# Altium PCB MT6825.PcbDoc
Units mil, origin at the board's own origin, x right, y up, seen from the top; angles counter-clockwise.
Board outline 1600 x 1600 mil, 2 copper layers (Top Layer, Bottom Layer); 7 components, 6 nets, 30 pads, 8 vias.
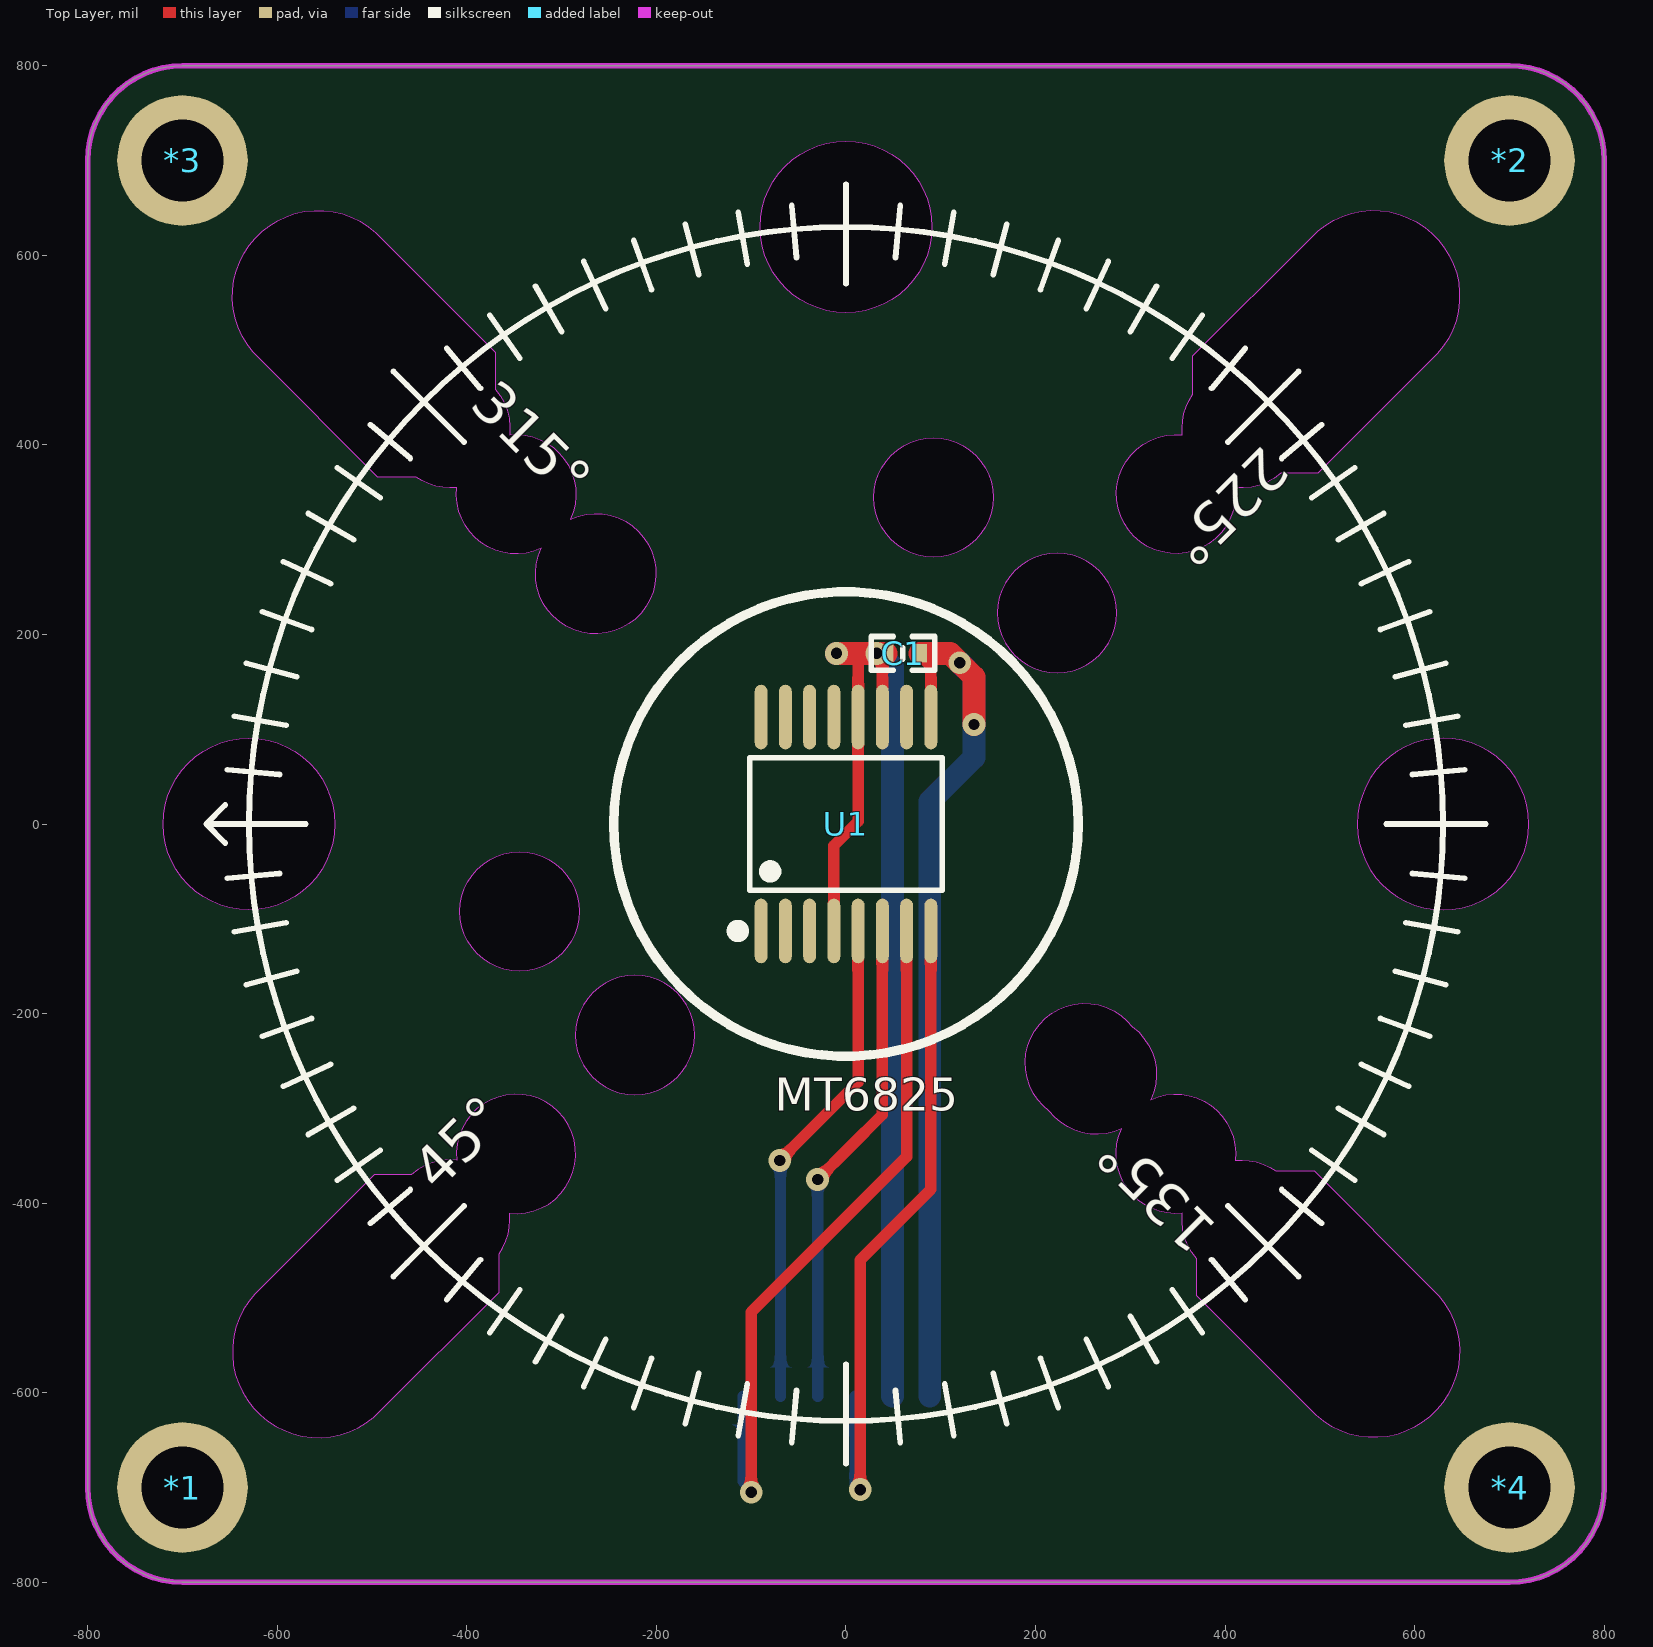
[diagram p0: Top Layer view]
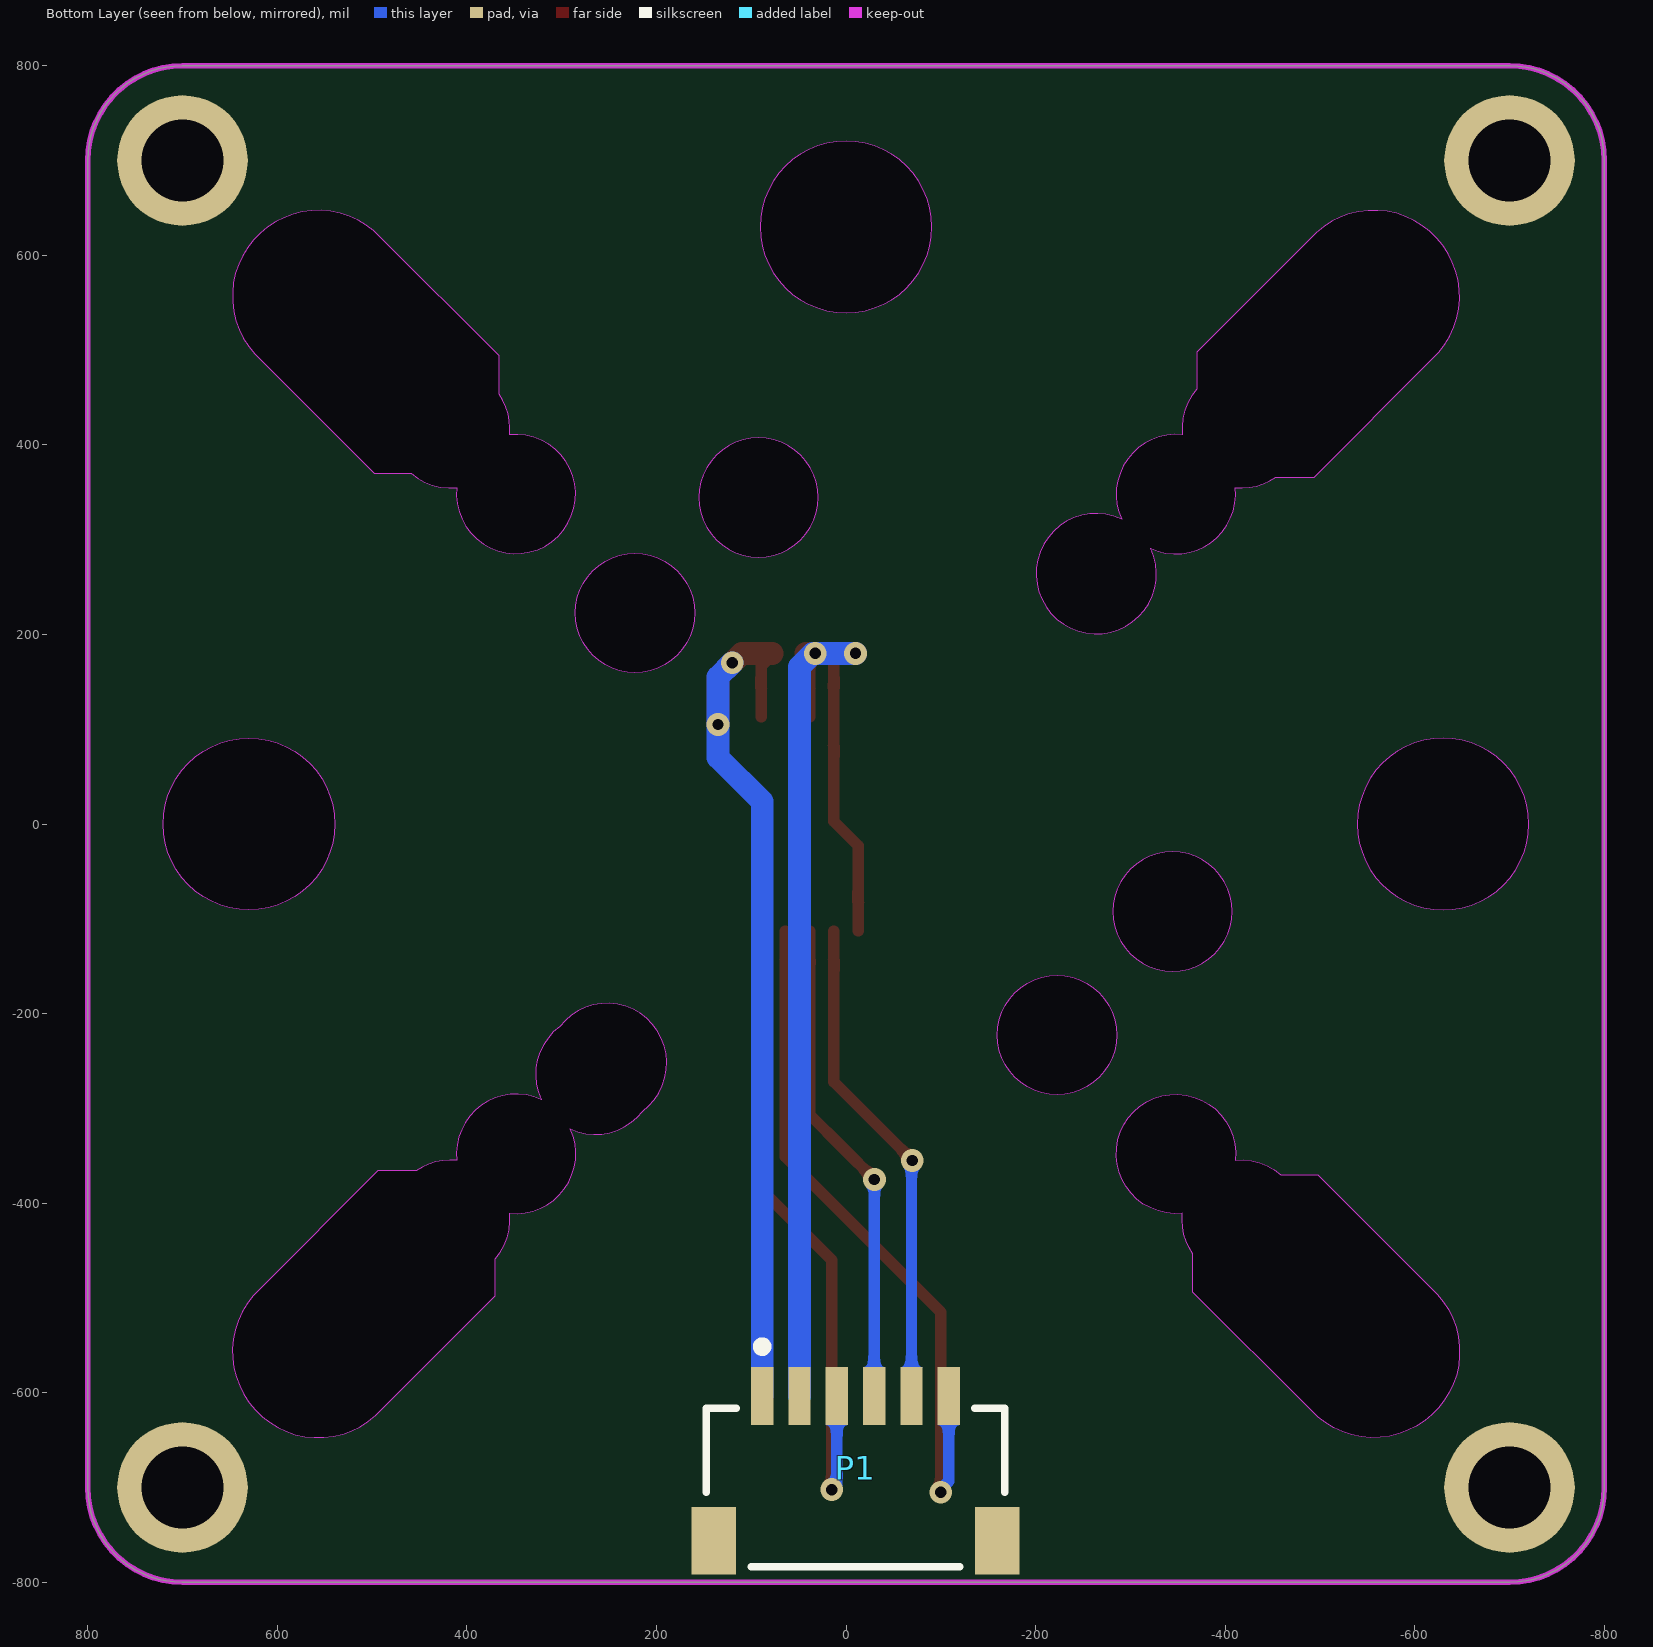
[diagram p1: Bottom Layer view, seen from below]

## Layer stack, top to bottom
Top Solder: solder mask 0.4, Solder Resist, Dk 3.5
Top Layer: signal copper 1.4
Dielectric 1: dielectric 12.6, FR-4, Dk 4.8
Bottom Layer: signal copper 1.4
Bottom Solder: solder mask 0.4, Solder Resist, Dk 3.5

## Board outline
-700,-800 cw(c-699.99,-699.99) -800,-700 -800,700 cw(c-699.99,699.99) -700,800 700,800 cw(c699.99,699.99) 800,700 800,-700 cw(c699.99,-699.99) 700,-800
cut-out: 267.26,267.26 ccw(c222.72,222.72) 178.18,267.26 ccw(c222.72,222.72) 178.18,178.18 ccw(c222.72,222.72) 267.26,178.18 ccw(c222.72,222.72)
cut-out: -178.16,-178.16 ccw(c-222.7,-222.7) -267.25,-178.16 ccw(c-222.7,-222.7) -267.25,-267.25 ccw(c-222.7,-222.7) -178.16,-267.25 ccw(c-222.7,-222.7)
cut-out: -629.92,-90.55 cw(c-629.92,0) -720.47,0 cw(c-629.92,0) -629.92,90.55 cw(c-629.92,0) -539.37,0 cw(c-629.92,0)
cut-out: 539.37,0 ccw(c629.92,0) 629.92,-90.55 ccw(c629.92,0) 720.47,0 ccw(c629.92,0) 629.92,90.55 ccw(c629.92,0)
cut-out: 0,539.37 cw(c0,629.92) -90.55,629.92 cw(c0,629.92) 0,720.47 cw(c0,629.92) 90.55,629.92 cw(c0,629.92)
cut-out: -344.53,-155.3 cw(c-344.53,-92.31) -407.52,-92.31 cw(c-344.53,-92.31) -344.53,-29.32 cw(c-344.53,-92.31) -281.54,-92.31 cw(c-344.53,-92.31)
cut-out: 92.33,281.55 cw(c92.33,344.55) 29.33,344.55 cw(c92.33,344.55) 92.33,407.54 cw(c92.33,344.55) 155.32,344.55 cw(c92.33,344.55)
cut-out: -493.82,365.83 -618.7,490.71 cw(c-556.77,556.77) -495.99,623.89 -370,497.9 -370,458.91 cw(c-417.55,417.63) -354.97,410.64 cw(c-348.13,347.91) -290.71,321.74 cw(c-264.09,264.1) -321.73,290.72 cw(c-347.98,347.98) -410.59,354.87 cw(c-417.45,417.53) -453.52,365.83
cut-out: -623.89,-495.99 ccw(c-556.77,-556.77) -490.71,-618.7 -365.83,-493.82 -365.83,-453.52 ccw(c-417.57,-417.58) -354.96,-410.6 ccw(c-348.02,-348.04) -410.61,-354.69 ccw(c-417.23,-417.48) -458.91,-370.06 -497.9,-370
cut-out: 354.97,-410.64 cw(c348.13,-347.91) 290.71,-321.74 cw(c264.39,-264.76) 214.67,-303.06 cw(c252.13,-252.27) 302.15,-213.8 cw(c264.3,-264.38) 321.73,-290.72 cw(c347.98,-347.98) 410.59,-354.87 cw(c417.45,-417.53) 453.52,-365.83 493.82,-365.83 618.7,-490.71 cw(c556.77,-556.77) 495.99,-623.89 370,-497.9 370,-458.91 cw(c417.56,-417.63)
cut-out: 354.87,410.59 cw(c417.53,417.45) 365.83,453.52 365.83,493.82 490.71,618.7 cw(c556.77,556.77) 623.89,495.99 497.9,370 458.91,370 cw(c417.63,417.56) 410.64,354.97 cw(c348.17,348.1)

## Design rules (kind name [scope] priority, off if disabled: settings)
Clearance [All] p1: gap=6 ignorepadtopadclearanceinfootprint=TRUE except(0: Arc-Hole Track-Hole SMDPad-Hole THPad-Hole Via-Hole Fill-Hole Poly-Hole Region-Hole Text-Hole)
PolygonConnect [All] p1: connectstyle=Relief reliefconductorwidth=10 reliefentries=4 polygonreliefangle="90 Angle" airgapwidth=10
RoutingVias [All] p1: holewidth=12 width=24 viastyle="Through Hole" minholewidth=12 minwidth=24 maxholewidth=24 maxwidth=48
SolderMaskExpansion [All] p1: expansion=4 istentingtop=FALSE
Width [All] p1: maxlimit=100 minlimit=10 preferedwidth=10
30 further rules are at their usual default settings.

## Components (designator, comment, footprint, x,y, rotation, side; value= is the part's Value field where it differs from the comment)
*1 "PAD2.0" PAD2.0 -699.99,-699.99 r0 top
*2 "PAD2.0" PAD2.0 699.99,699.99 r0 top
*3 "PAD2.0" PAD2.0 -699.99,699.99 r0 top
*4 "PAD2.0" PAD2.0 699.99,-699.99 r0 top
C1 "0.1uF" "C 0402_L" 60.01,180.01 r180 top
P1 "ENC_SPI" JST-SM06B-SRSS-TB_V -10,-700 r180 bottom
U1 "MT6825GT-M4D" TSSOP-16_L5.0-W4.4-P0.65-LS6.4-BL 0,-0.01 r0 top locked

## Footprints (in the part's own frame and the unit in brackets; to place one, negate y for a bottom-side part, rotate by r counter-clockwise, add the part's x,y. Pads: shape width x height; smd on the part's side, far side on the other; paste and mask are expansions set on the pad)
"C 0402_L" [mm] "无极性贴片电容         淘宝ID:黄晶宝石"
  rect 0.4x0.5 smd: 1(-0.45,0) 2(0.45,0)
  silkscreen extent -0.85,-0.45 0.85,0.45, body extent -0.5,-0.26 0.5,0.26, height 0.53
JST-SM06B-SRSS-TB_V [mm] "SMD, 6-Leads, Body 8x4.25mm, Pitch 1mm"
  rect 0.6x1.55 smd: 1(-2.5,2.45) 2(-1.5,2.45) 3(-0.5,2.45) 4(0.5,2.45) 5(1.5,2.45) 6(2.5,2.45)
  rect 1.2x1.8 smd: MP1(-3.8,-1.425) MP2(3.8,-1.425)
  silkscreen extent -4,-2.12 4,3.9, body extent -4,-2.12 4,2.83, height 2.9
PAD2.0 [mm]
  round 3.5 hole 2.2: 0(0,0)
TSSOP-16_L5.0-W4.4-P0.65-LS6.4-BL [mm]
  oval 0.343x1.731 smd: 1(-2.275,-2.866) 2(-1.625,-2.866) 3(-0.975,-2.866) 4(-0.325,-2.866) 5(0.325,-2.866) 6(0.975,-2.866) 7(1.625,-2.866) 8(2.275,-2.866) 9(2.275,2.866) 10(1.625,2.866) 11(0.975,2.866) 12(0.325,2.866) 13(-0.325,2.866) 14(-0.975,2.866) 15(-1.625,2.866) 16(-2.275,2.866)
  silkscreen extent -3.05,-3.02 2.58,1.77, body extent -2.51,-3.21 2.49,3.19, height 1.1

## Part data
C1: library part C, "贴片电容"
P1: library part SM06B-SRSS-TB(LF)(SN), "Male Header, Pitch 1 mm, 1 x 6 Position, Height 2.9 mm, -25 to 85 degC, RoHS, Tape and Reel", Manufacturer=JST, Package Description="Male Header, Pitch 1 mm, 1 X 6 Position, Height 2.9 mm", Datasheet URL=http://www.jst-mfg.com/product/pdf/eng/eSR.pdf, Datasheet Version=05/2016, Manufacturer URL=http://www.jst.com/home2.html, Mounting Technology=SurfaceMount, No of Positions=6, Package Reference=SM06B-SRSS-TB(LF)(SN), Pitch=1mm, Style/Orientation=RightAngleHeader/Plug, Termination=Solder, Type=ShroudedHeader
U1: BOM_JLCPCB Part Class="Extended Part", BOM_Manufacturer="Magn Tek", BOM_Manufacturer Part=MT6825GT-M4D, BOM_Supplier=LCSC, BOM_Supplier Part=C879563, Contributor=LCSC, spicePre=U, spiceSymbolName=MT6825GT-M4D

## Via types
v1: diameter 24, hole 12, Top Layer to Bottom Layer, tented both sides, 8 vias

## Nets (pads, with @x,y where several pads share a name; then routed paths per layer and width w, separated by ;. In a path a pad name is that pad's centre, name@x,y a point inside that pad or via, vN(x,y) a via of type N, cw(c..) or ccw(c..) an arc to the next point about the centre after c; other vN are vias at no path point)
ENC_MISO: P1.5 U1.5 | length 525.4
  Top Layer w12: v1(-70,-355) 12.8,-272.2 U1.5
  Bottom Layer w12: v1(-70,-355) -69.06,-355.94 P1.5
ENC_MOSI: P1.4 U1.6 | length 519.2
  Top Layer w12: v1(-30,-375) 2.84,-342.16 38.39,-306.61 U1.6
  Bottom Layer w12: v1(-30,-375) -30,-491.88 -29.68,-492.19 P1.4
ENC_nCS: P1.3 U1.8 | length 721.1
  Top Layer w12: v1(15.01,-702.17) 15.01,-459.99 89.57,-385.43 U1.8
  Bottom Layer w12: P1.3 9.68,-693.6 15.01,-698.93 v1(15.01,-702.17)
ENC_SCLK: P1.6 U1.7 | length 765
  Top Layer w12: v1(-100,-705) -100,-515 63.98,-351.02 U1.7
  Bottom Layer w12: P1.6 -108.43,-693.33 -100,-701.75 v1(-100,-705)
GND: C1.2 P1.2 U1.4 U1.11 U1.12 | length 1262.8
  Top Layer w12: U1.4 -12.79,-22.79 12.8,2.8 U1.12 12.8,178.47 11.26,180.01 ; v1(32.51,180.01) 32.51,176.76 38.39,170.88 U1.11
  Top Layer w24: v1(-9.99,180.01) 11.26,180.01 v1(32.51,180.01) C1.2
  Bottom Layer w24: v1(-9.99,180.01) v1@35.01,180.01 ; v1(32.51,180.01) v1@35,180.01 ; P1.2 49.06,165.95 v1@35,180.01
VCC3V3: C1.1 P1.1 U1.9 | length 988.8
  Top Layer w12: C1.1 77.72,178.04 89.57,166.2 U1.9
  Top Layer w24: C1.1 110.01,180.01 135.01,155.01 v1(135.01,105.01)
  Bottom Layer w24: P1.1 88.43,23.7 135.01,70.28 v1(135.01,105.01) 135.01,155.01 v1(120.01,170.01)
pads on no net: *1.0 *2.0 *3.0 *4.0 P1.MP1 P1.MP2 U1.1 U1.2 U1.3 U1.10 U1.13 U1.14 U1.15 U1.16

## Keep-outs
Keep-Out Layer:
  the board outline again, w5.98

## Silkscreen, mask and mechanical layers (free items; w line width, h text height)
Top Overlay:
  circle w6: c0,0 r629.92
  circle w10: c0,0 r245
  lines w6: -655,-20 -675,0 ; -655,20 -675,0 ; -652.56,-57.09 -597.72,-52.29 ; -652.56,57.09 -597.72,52.29 ; -645.1,-113.75 -590.88,-104.19 ; -645.1,113.75 -590.89,104.19 ; -632.73,-169.54 -579.56,-155.29 ; -632.73,169.54 -579.56,155.29 ; -615.55,-224.04 -563.82,-205.21 ; -615.55,224.04 -563.82,205.21 ; -593.68,-276.84 -543.78,-253.57 ; -593.68,276.84 -543.79,253.57 ; -570,0 -675,0 ; -567.29,-327.53 -519.62,-300 ; -567.29,327.53 -519.62,300 ; -536.59,-375.72 -491.49,-344.15 ; -536.59,375.72 -491.49,344.15 ; -501.8,-421.06 -459.63,-385.67 ; -501.8,421.06 -459.63,385.67 ; -477.3,-477.3 -403.05,-403.05 ; -477.3,477.3 -403.05,403.05 ; -463.19,-463.19 -424.26,-424.26 ; -463.19,463.19 -424.26,424.26 ; -421.06,-501.8 -385.67,-459.63 ; -421.06,501.8 -385.67,459.63 ; -375.72,-536.59 -344.15,-491.49 ; -375.72,536.59 -344.15,491.49 ; -327.53,-567.29 -300,-519.62 ; -327.53,567.29 -300,519.62 ; -276.84,-593.68 -253.57,-543.78 ; -276.84,593.68 -253.57,543.79 ; -224.04,-615.55 -205.21,-563.82 ; -224.04,615.55 -205.21,563.82 ; -169.54,-632.73 -155.29,-579.56 ; -169.54,632.73 -155.29,579.56 ; -113.75,-645.1 -104.19,-590.88 ; -113.75,645.1 -104.19,590.89 ; -57.09,-652.56 -52.29,-597.72 ; -57.09,652.56 -52.29,597.72 ; 0,-675 0,-570 ; 0,-655.05 0,-600 ; 0,570 0,675 ; 0,600 0,655.05 ; 52.29,-597.72 57.09,-652.56 ; 52.29,597.72 57.09,652.56 ; 104.19,-590.88 113.75,-645.1 ; 104.19,590.89 113.75,645.1 ; 155.29,-579.56 169.54,-632.73 ; 155.29,579.56 169.54,632.73 ; 205.21,-563.82 224.04,-615.55 ; 205.21,563.82 224.04,615.55 ; 253.57,-543.78 276.84,-593.68 ; 253.57,543.79 276.84,593.68 ; 300,-519.62 327.53,-567.29 ; 300,519.62 327.53,567.29 ; 344.15,-491.49 375.72,-536.59 ; 344.15,491.49 375.72,536.59 ; 385.67,-459.63 421.06,-501.8 ; 385.67,459.63 421.06,501.8 ; 403.05,-403.05 477.3,-477.3 ; 403.05,403.05 477.3,477.3 ; 424.26,-424.26 463.19,-463.19 ; 424.26,424.26 463.19,463.19 ; 459.63,-385.67 501.8,-421.06 ; 459.63,385.67 501.8,421.06 ; 491.49,-344.15 536.59,-375.72 ; 491.49,344.15 536.59,375.72 ; 519.62,-300 567.29,-327.53 ; 519.62,300 567.29,327.53 ; 543.79,-253.57 593.68,-276.84 ; 543.78,253.57 593.68,276.84 ; 563.82,-205.21 615.55,-224.04 ; 563.82,205.21 615.55,224.04 ; 570,0 675,0 ; 579.56,-155.29 632.73,-169.54 ; 579.56,155.29 632.73,169.54 ; 590.89,-104.19 645.1,-113.75 ; 590.88,104.19 645.1,113.75 ; 597.72,-52.29 652.56,-57.09 ; 597.72,52.29 652.56,57.09 ; 600,0 655.05,0
  text "315°" at -408.31,430.66 h75 r315
  text "225°" at 429.6,411.15 h75 r225
  text "MT6825" at -75,-314.36 h60
  text "45°" at -420.56,-399.44 h75 r45
  text "135°" at 404.4,-415.53 h75 r135
Mechanical 1:
  circle w5.98: c222.72,222.72 r62.99
  circle w5.98: c-222.7,-222.7 r62.99
  circle w5.98: c92.33,344.55 r62.99
  circle w5.98: c-344.53,-92.31 r62.99
  circle w5.98: c0,629.92 r90.55
  circle w5.98: c-629.92,0 r90.55
  circle w5.98: c629.92,0 r90.55
  lines w5.98: -458.91,-370.06 cw(c-417.57,-417.58) -410.64,-354.97 ; -458.91,-370 -497.9,-370 -623.89,-495.99 ccw(c-556.77,-556.77) -490.71,-618.7 -365.83,-493.82 -365.83,-468.17 -365.83,-453.52 ccw(c-417.57,-417.58) -354.96,-410.6 ; -410.61,-354.69 cw(c-347.98,-347.98) -354.87,-410.59 ; -410.59,354.87 ccw(c-347.98,347.98) -321.73,290.72 ccw(c-264.46,264.48) -291.05,321.58 ; -410.6,354.96 cw(c-417.58,417.57) -453.52,365.83 -468.17,365.83 -493.82,365.83 -618.7,490.71 cw(c-556.77,556.77) -495.99,623.89 -370,497.9 -370,458.91 ; -370.06,458.91 cw(c-417.58,417.57) -354.97,410.64 ; -354.69,410.61 cw(c-347.98,347.98) -290.71,321.74 ; 214.67,-303.06 ccw(c264.46,-264.48) 291.05,-321.58 ; 214.85,-302.92 cw(c252.23,-252.21) 302.15,-213.8 ; 290.71,-321.74 ccw(c347.98,-347.98) 354.69,-410.61 ; 302.19,-214.03 cw(c264.46,-264.48) 321.73,-290.72 cw(c347.98,-347.98) 410.59,-354.87 ; 354.87,410.59 ccw(c347.98,347.98) 410.61,354.69 ; 354.96,410.6 cw(c417.57,417.58) 365.83,453.52 365.83,468.17 365.83,493.82 490.71,618.7 cw(c556.77,556.77) 623.89,495.99 497.9,370 458.91,370 ; 354.97,-410.64 ccw(c417.58,-417.57) 370.06,-458.91 ; 370,-458.91 370,-497.9 495.99,-623.89 ccw(c556.77,-556.77) 618.7,-490.71 493.82,-365.83 468.17,-365.83 453.52,-365.83 ccw(c417.58,-417.57) 410.6,-354.96 ; 410.64,354.97 ccw(c417.57,417.58) 458.91,370.06 ; -800,-700 ccw(c-699.99,-699.99) -700,-800 700,-800 ccw(c699.99,-699.99) 800,-700 800,700 ccw(c699.99,699.99) 700,800 -700,800 ccw(c-699.99,699.99) -800,700 -800,-700